# EAGLE board ConcentradorCUSB (EAGLE 7.6.0)
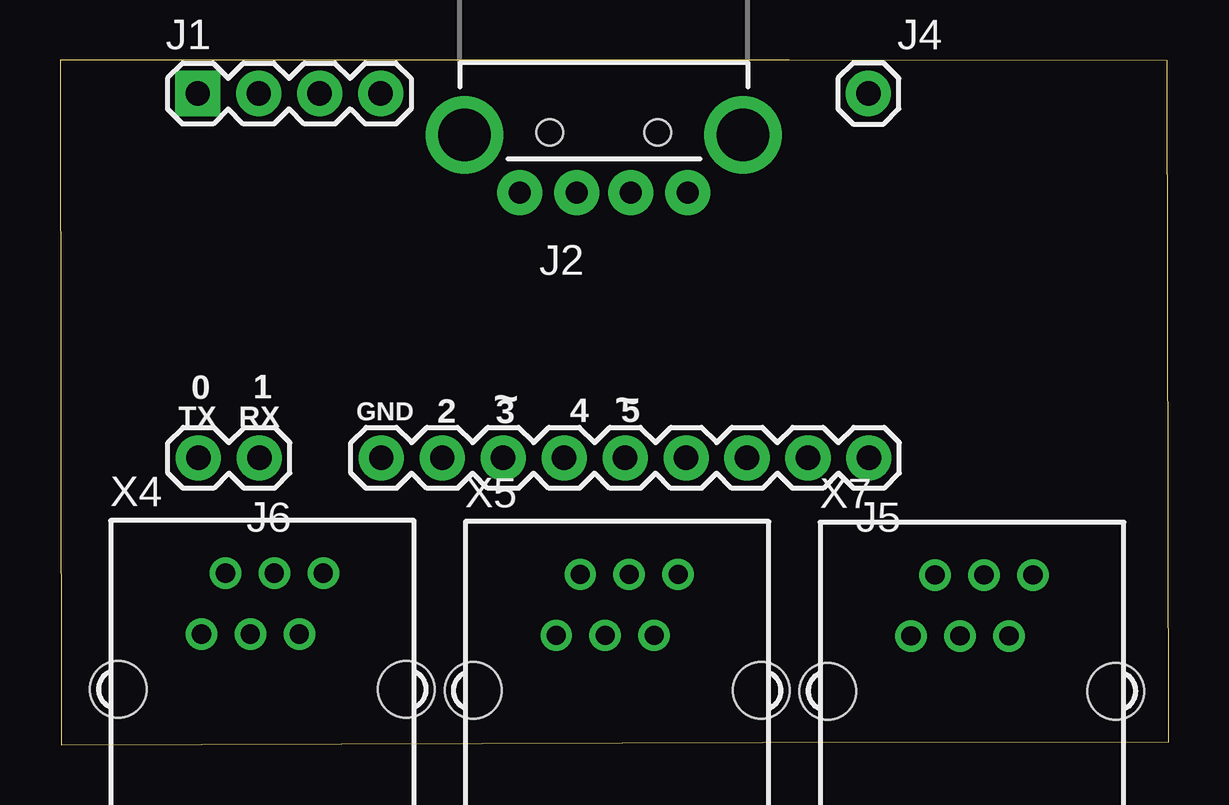
[diagram p0: board, top side]
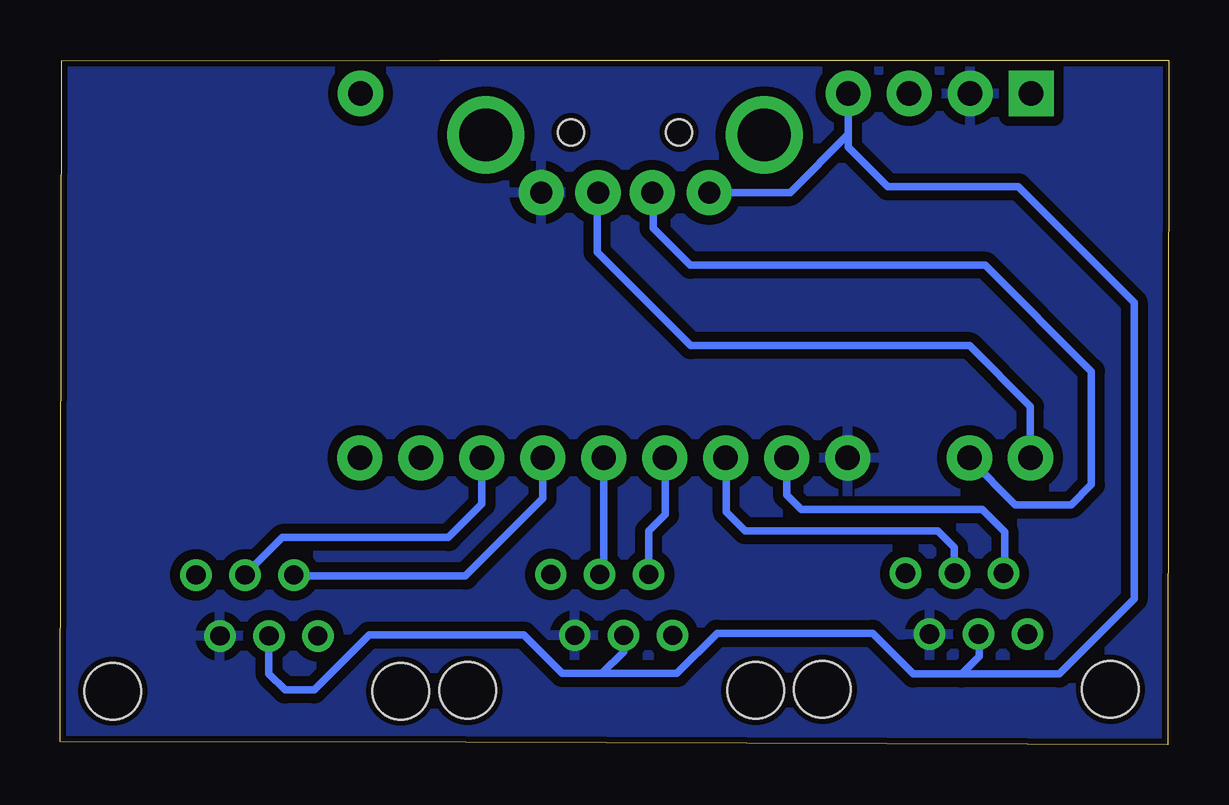
[diagram p1: board, bottom side, seen from below]

Size 46.2 x 28.55 mm. Coordinates in mm from the lower left corner, seen from the top.
Outline: 0.05,0 29.29,0.1 46.2,0.13 46.13,28.52 30.38,28.55 0,28.55 0.05,0
Copper layers (1*16): Top 0.035mm / dielectric 1.5mm / Bottom 0.035mm
Design rules "ITEADstudio_DRC *": minimum track width 6mil, minimum drill 12mil, track to track 16mil, track to pad 12mil, pad to pad 6mil, via to via 6mil, smd to smd 0mil, copper to edge 10mil, drill to drill 10mil, minimum pad ring 10mil, minimum via ring 6mil, stop-mask expansion 2mil, vias tented up to drill 100mil, thermal gap 15mil
Net classes: 1 power: width 0.381 mm, clearance 0.254 mm

## Footprints (pad centres in the part's own frame; a part is rotated, then mirrored left to right if it is on the bottom)
1X04 = drill 1.016 pad 1.88 square: 1 0,0 | drill 1.016 pad 1.88: 2 2.54,0; 3 5.08,0; 4 7.62,0
USB-A-H = drill 0.914 pad 1.88: D+ 2.4,1.127; D- 2.4,-1.127; GND 2.4,3.5; VBUS 2.4,-3.5 | drill 2.2: GND2 0,-5.8; GND3 0,5.8 | hole 1.1: -0.1,2.25; -0.1,-2.25
1X01 = drill 1.016 pad 1.88: 1 0,0
1X09 = drill 1.016 pad 1.88: 1 0,0; 2 2.54,0; 3 5.08,0; 4 7.62,0; 5 10.16,0; 6 12.7,0; 7 15.24,0; 8 17.78,0; 9 20.32,0
1X02 = drill 1.016 pad 1.88: 1 0,0; 2 2.54,0
YH-55-10 = drill 0.8 pad 1.3: 1 -2.54,2.3; 2 -1.54,4.84; 3 -0.5,2.3; 4 0.5,4.84; 5 1.54,2.3; 6 2.54,4.84 | hole 2.36: -6,0; 6,0

## Placement (x,y rotation side)
J1  [1X04]  5.74,27.15 0 top
J2  USB-A-H  [USB-A-H]  22.66,25.43 270 top
J4  [1X01]  33.68,27.15 0 top
J5  [1X09]  33.71,11.96 180 top
J6  [1X02]  8.31,11.96 180 top
X4  YH-55-10  [YH-55-10]  8.43,2.31 0 top
X5  YH-55-10  [YH-55-10]  23.22,2.26 0 top
X7  YH-55-10  [YH-55-10]  38,2.24 0 top

## Library data of the parts
J1 = SparkFun-Connectors; PROD_ID: CONN-09696
J2 = SparkFun-Connectors; PROD_ID: CONN-08367
J4-J6 = SparkFun-Connectors
X4 X5 X7 = con-wenzhou-yihua; OC_FARNELL: unknown; OC_NEWARK: unknown

## Nets
GND [power]: J1.2 J2.GND J5.9 X4.5 X5.5 X7.5
N$1: J5.5 X5.4
N$2: J5.6 X5.2
N$3: J5.3 X7.4
N$4: J2.D+ J6.2
N$7: J5.4 X7.2
N$8: J5.7 X4.4
N$9: J5.8 X4.2
N$10: J5.2
N$11: J5.1
N$12: J4.1
N$16: J2.D- J6.1
VIN: J1.4 J2.VBUS X4.3 X5.3 X7.3

## Tracks (layer width: path | path; a pad name or v marks a point on that pad's centre or on a via)
AGND
  pour Bottom: 45.72,28.57 45.95,0 -0.08,0.03 0.03,28.4
GND
  pour Bottom: 0.03,28.4 45.77,28.5 46.08,0.05 0,-0.03
N$1
  Bottom 0.305: J5.5 23.55,7.27 X5.4
N$2
  Bottom 0.305: X5.2 21.68,8.91 20.98,9.6 20.98,11.94 J5.6
N$3
  Bottom 0.305: J5.3 28.63,10.03 30.02,8.64 36.94,8.64 X7.4
N$4
  Bottom 0.305: J6.2 5.77,14.1 8.31,16.64 19.91,16.64 23.83,20.55 23.83,22.98 J2.D+
N$7
  Bottom 0.305: J5.4 26.09,10.26 29.31,7.04 36.42,7.04 X7.2
N$8
  Bottom 0.305: X4.4 8.93,8.22 9.63,8.92 17.65,8.92 18.44,9.7 18.44,11.94 J5.7
N$9
  Bottom 0.305: J5.8 15.93,10.41 15.32,9.8 7.77,9.8 6.83,8.87 6.83,7.21 X4.2
N$16
  Bottom 0.305: J6.1 8.31,11.91 6.4,10.01 4.06,10.01 3.23,10.85 3.23,15.57 7.65,19.99 19.94,19.99 21.49,21.54 21.49,22.98 J2.D-
VIN
  Bottom 0.305: X7.3 37.5,2.96 36.82,2.29 35.61,2.29 33.32,4.57 26.87,4.57 25.27,2.97 23.62,2.97 | 23.62,2.97 20.5,2.97 18.82,4.65 12.34,4.65 10.64,2.95 8.64,2.95 | X4.3 7.9,4.58 7.9,3.68 8.64,2.95 | X5.3 22.72,3.88 23.62,2.97 | J1.4 13.36,25.45 | 13.36,25.45 13.36,24.92 11.71,23.27 6.27,23.27 1.45,18.44 1.45,6.07 4.57,2.95 8.64,2.95 | J2.VBUS 15.79,23.02 13.36,25.45

## Text on the board
_tsilk: 0 | 1 | TX | RX | 2 | ~ | 3 | 4 | ~ | 5 | GND